# EAGLE board saturn_frontend_rv6 (EAGLE 7.7.0)
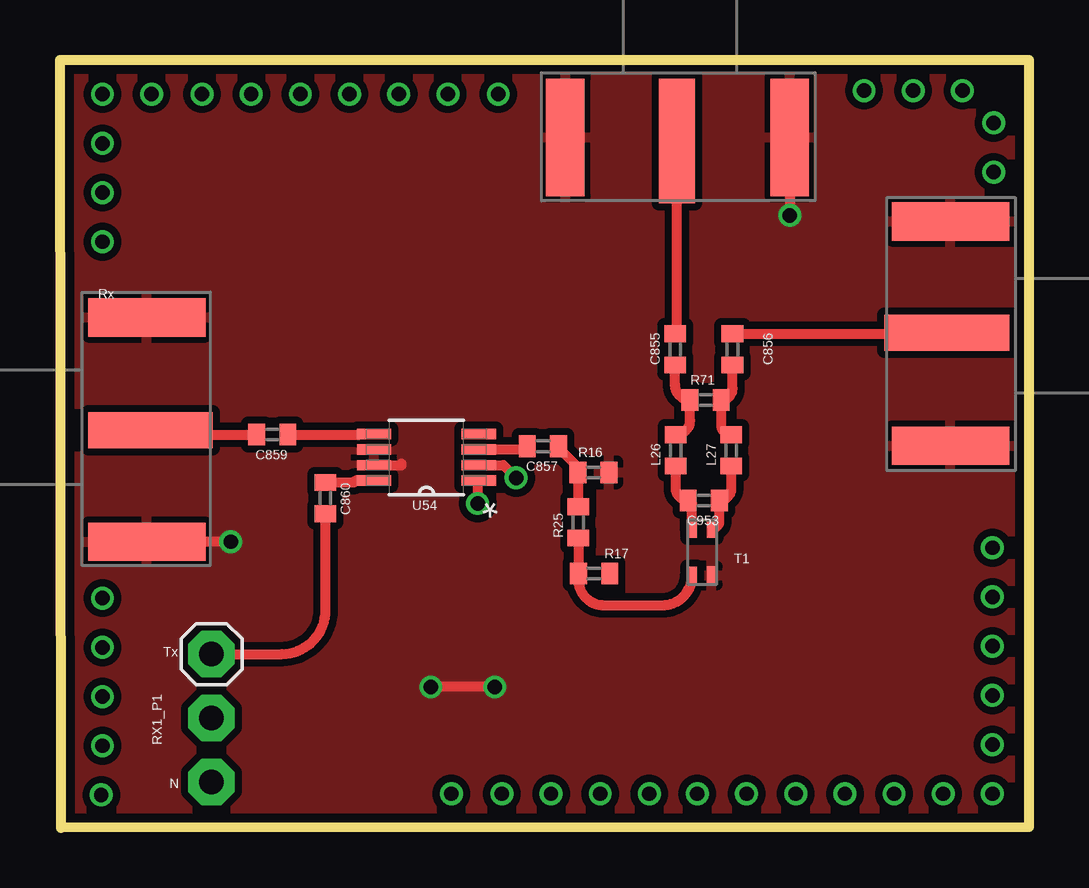
[diagram p0: board, top side]
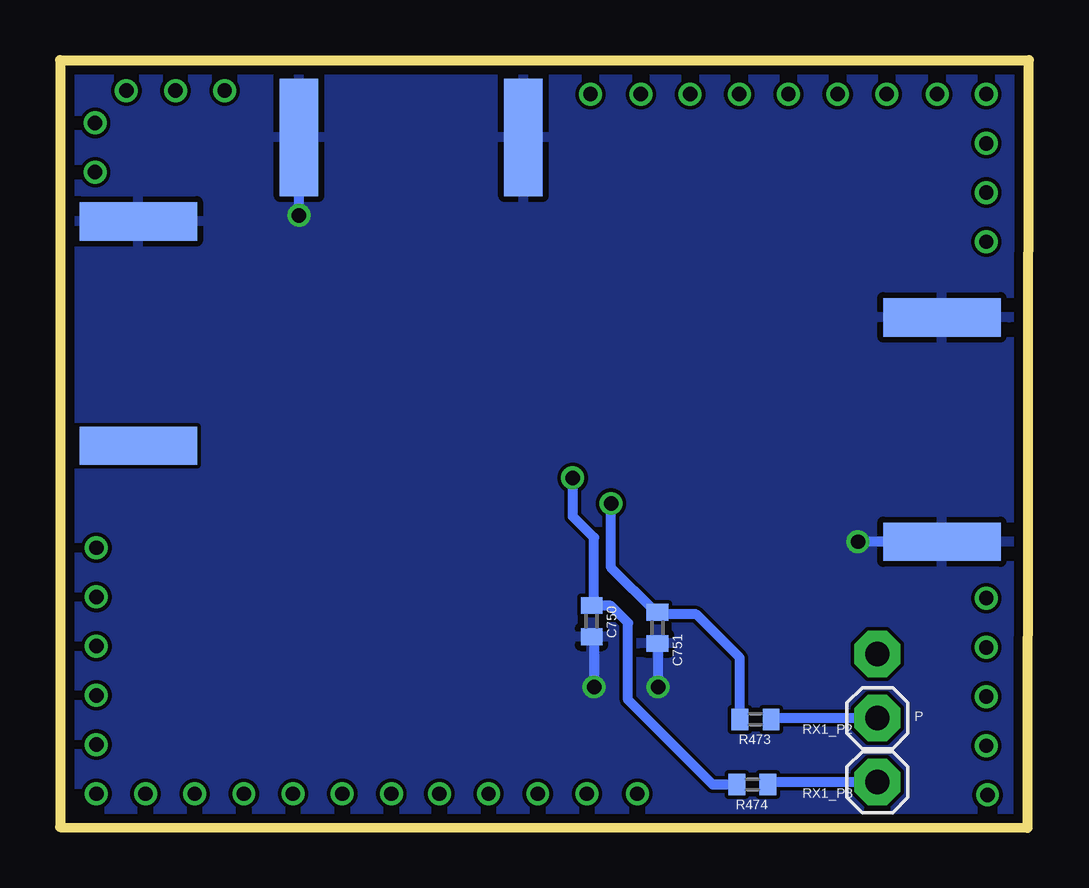
[diagram p1: board, bottom side, seen from below]

Size 40.39 x 31.99 mm. Coordinates in mm from the lower left corner, seen from the top.
Outline: 40.39,31.99 40.39,0.03 0.05,0 0,31.99 40.39,31.99
Copper layers (1*16): Top 0.0356mm / dielectric 1.5011mm / Bottom 0.0356mm
Design rules "oshpark-2layer": minimum track width 6mil, minimum drill 13mil, track to track 6mil, track to pad 6mil, pad to pad 6mil, via to via 6mil, smd to smd 6mil, copper to edge 15mil, drill to drill 6mil, minimum pad ring 7mil, minimum via ring 7mil, stop-mask expansion 2.5mil, vias tented up to drill 0mil, thermal gap 10mil

## Footprints (pad centres in the part's own frame; a part is rotated, then mirrored left to right if it is on the bottom)
C0402 = smd 0.7 x 0.9: 1 -0.65,0; 2 0.65,0
ATB2012E-50011M-T01 = smd 0.75 x 0.4: 1 0.37,1.02; 2 0.385,0.205; 3 2.32,1.02; 4 2.325,0.21
SMA132289 = smd 1.6 x 4.9 bottom: GND 0.9,2.55; P$5 10.25,2.55 | smd 1.6 x 4.9: P$1 10.25,2.55; P$2 0.9,2.55 | smd 1.5 x 5.2: P$3 5.6,2.7
R0402 = smd 0.7 x 0.9: 1 -0.65,0; 2 0.65,0
1X01 = drill 1.016 pad 1.93 octagon: 1 0,0
SOP65P490X110-8N = smd 1.422 x 0.432: 1 -2.184,0.965; 2 -2.184,0.33; 3 -2.184,-0.33; 4 -2.184,-0.965; 5 2.184,-0.965; 6 2.184,-0.33; 7 2.184,0.33; 8 2.184,0.965

## Placement (x,y rotation side)
C750  100 pF  [C0402]  18.23,8.61 270 bottom
C751  100 pF  [C0402]  15.48,8.33 270 bottom
C855  100 pF  [C0402]  25.64,19.93 90 top
C856  100 pF  [C0402]  28.03,19.93 90 top
C857  100 pF  [C0402]  20.13,15.9 180 top
C859  100 pF  [C0402]  8.85,16.38 180 top
C860  100 pF  [C0402]  11.06,13.74 270 top
C953  400 fF  [C0402]  26.84,13.64 180 top
E$1  [ATB2012E-50011M-T01]  27.37,10.13 90 top
E$2  [SMA132289]  1.07,22.17 270 top
E$3  [SMA132289]  31.32,31.32 180 top
E$4  [SMA132289]  39.67,15.02 90 top
L26  1 nH  [R0402]  25.67,15.72 90 top
L27  1 nH  [R0402]  27.98,15.72 90 top
R16  221 Ohm  [R0402]  22.24,14.81 0 top
R17  221 Ohm  [R0402]  22.26,10.59 0 top
R25  23.7 Ohm  [R0402]  21.6,12.72 90 top
R71  93.7 Ohm  [R0402]  26.91,17.83 0 top
R473  100 Ohm  [R0402]  11.39,4.52 180 bottom
R474  100 Ohm  [R0402]  11.52,1.8 180 bottom
RX1_P1  [1X01]  6.31,7.24 0 top
RX1_P2  [1X01]  6.31,4.57 0 bottom
RX1_P3  [1X01]  6.31,1.91 0 bottom
U54  [SOP65P490X110-8N]  15.27,15.44 180 top

## Library data of the parts
C750 C751 C855-C857 C859 C860 C953 L26 L27 R16 R17 R25 R71 R473 R474 = eagle-ltspice
E$1-E$4 = cody_custom_library
RX1_P1-RX1_P3 = adafruit
U54 = SOP65P490X110-8N

## Nets
GND: C750.2 C751.2 E$1.2 E$2.GND E$2.P$1 E$2.P$2 E$2.P$5 E$3.GND E$3.P$1 E$3.P$2 E$3.P$5 E$4.P$1 E$4.P$2 E$4.P$5 R16.2 U54.6 U54.7
S$1: C859.2
S$2: C860.2 RX1_P1.1
S$3: C859.1 U54.5
S$5: C860.1 U54.8
S$6: R473.1 RX1_P2.1
S$7: R474.1 RX1_P3.1
S$8: E$1.1 R17.1 R25.1
S$10: C855.1 L26.2 R71.1
S$12: C857.2 U54.3
S$14: R16.1 R25.2
S$19: C856.1 L27.2 R71.2
S$23: C751.1 R473.2 U54.1
S$25: C953.1 E$1.4 L27.1
S$28: C857.1
S$29: C953.2 E$1.3 L26.1
S$32: C750.1 R474.2 U54.2
S$33: C856.2 E$4.P$3
S$34: C855.2 E$3.P$3

## Tracks (layer width: path | path; a pad name or v marks a point on that pad's centre or on a via)
GND  (via drill 0.6)
  Top 0.406: v18.12,5.87 v15.46,5.87 | U54.7 14.22,15.11 14.22,15.17 | v7.12,11.92 E$2.P$1 | E$3.P$2 v30.42,25.52
  Bottom 0.406: C751.2 15.46,7.65 v15.46,5.87 15.46,5.69 | v18.12,5.87 18.12,8 C750.2 | E$2.P$1 v7.12,11.92 | v30.42,25.52 E$3.P$2
  pour Top (isolate 0.305): 40.39,31.94 0,31.99 0.05,0 40.44,0.03
  pour Bottom: 0.02,31.97 40.42,32.02 40.42,0.02 0.07,0.02
S$1
  Top 0.406: 2.95,16.37 7.49,16.37 C859.2
S$2
  Top 0.406: 11.01,13.04 C860.2 11.06,9.07 11.07,9.07 arc-90 9.24,7.24 RX1_P1.1
S$3
  Top 0.406: C859.1 12.41,16.38 12.43,16.36 12.48,16.4 U54.5
S$5
  Top 0.406: C860.1 12.25,14.39 12.33,14.47 U54.8
S$6
  Bottom 0.406: RX1_P2.1 10.69,4.57 R473.1
S$7
  Bottom 0.406: 10.82,1.93 R474.1 10.77,1.9 RX1_P3.1
S$8
  Top 0.254: 26.35,10.34 E$1.1
  Top 0.406: R25.1 21.6,10.96 R17.1 21.61,10.33 arc90 22.67,9.27 25.11,9.27 arc90 E$1.1
S$10
  Top 0.406: L26.2 arc90 26.26,16.97 R71.1 arc-90 25.64,18.45 C855.1
S$12
  Top 0.406: U54.3 19.35,15.77 C857.2
S$14
  Top 0.254: 21.55,14.68 R16.1
  Top 0.406: R16.1 21.59,13.47 R25.2
S$18  (via drill 0.6)
  other vias: 18.27,30.57
S$19
  Top 0.406: L27.2 arc-90 27.56,16.79 R71.2 arc90 28.03,18.3 C856.1
S$23  (via drill 0.6)
  Top 0.406: 17.41,14.43 U54.1 17.41,14.4 v17.41,13.51
  Bottom 0.406: R473.2 12.04,7.08 13.86,8.89 15.39,8.89 C751.1 15.55,8.98 17.41,10.85 v17.41,13.51 17.41,13.69
S$25
  Top 0.254: 27.27,13.54 C953.1
  Top 0.406: 27.57,13.66 C953.1 | C953.1 27.49,13.81 | 27.9,15 L27.1 27.98,14.13 arc-90 C953.1 | E$1.4 arc90 27.49,12.79 C953.1
S$27  (via drill 0.6)
  other vias: 33.52,30.72
S$28
  Top 0.406: C857.1 20.78,15.83 21.5,15.11
S$29
  Top 0.254: 26.35,12.62 E$1.3 | 26.35,13.54 C953.2
  Top 0.406: C953.2 26.07,13.74 | 26.3,13.62 C953.2 | 25.59,15 L26.1 25.67,14.16 arc90 C953.2 | E$1.3 26.35,13.48 arc90 C953.2
S$32  (via drill 0.6)
  Top 0.406: v19.01,14.58 18.48,15.11 17.59,15.11 U54.2
  Bottom 0.406: v19.01,14.58 19.01,12.98 18.12,12.09 18.12,9.42 C750.1 18.21,9.25 17.41,9.25 16.7,8.53 16.7,5.33 13.17,1.8 R474.2
S$33
  Top 0.406: C856.2 36.97,20.58 E$4.P$3
S$34
  Top 0.406: C855.2 25.72,20.58 E$3.P$3
S$36  (via drill 0.6)
  other vias: 35.57,30.72
S$37  (via drill 0.6)
  other vias: 1.77,30.57
S$38  (via drill 0.6)
  other vias: 16.17,30.57
S$39  (via drill 0.6)
  other vias: 1.77,28.52
S$40  (via drill 0.6)
  other vias: 1.77,26.47
S$41  (via drill 0.6)
  other vias: 1.77,24.42
S$42  (via drill 0.6)
  other vias: 1.77,9.57
S$43  (via drill 0.6)
  other vias: 1.77,7.52
S$44  (via drill 0.6)
  other vias: 18.42,1.42
S$45  (via drill 0.6)
  other vias: 1.77,5.47
S$46  (via drill 0.6)
  other vias: 1.77,3.42
S$47  (via drill 0.6)
  other vias: 1.72,1.37
S$48  (via drill 0.6)
  other vias: 20.47,1.42
S$49  (via drill 0.6)
  other vias: 22.52,1.42
S$50  (via drill 0.6)
  other vias: 24.57,1.42
S$51  (via drill 0.6)
  other vias: 26.57,1.42
S$52  (via drill 0.6)
  other vias: 28.62,1.42
S$53  (via drill 0.6)
  other vias: 30.67,1.42
S$54  (via drill 0.6)
  other vias: 34.77,1.42
S$55  (via drill 0.6)
  other vias: 38.87,5.52
S$56  (via drill 0.6)
  other vias: 38.87,7.57
S$57  (via drill 0.6)
  other vias: 38.87,9.62
S$58  (via drill 0.6)
  other vias: 38.92,29.37
S$59  (via drill 0.6)
  other vias: 38.87,11.67
S$60  (via drill 0.6)
  other vias: 38.92,27.32
S$61  (via drill 0.6)
  other vias: 38.87,3.47
S$62  (via drill 0.6)
  other vias: 38.87,1.42
S$63  (via drill 0.6)
  other vias: 36.82,1.42
S$64  (via drill 0.6)
  other vias: 32.72,1.42
S$65  (via drill 0.6)
  other vias: 16.32,1.42
S$66  (via drill 0.6)
  other vias: 3.82,30.57
S$67  (via drill 0.6)
  other vias: 5.92,30.57
S$68  (via drill 0.6)
  other vias: 7.97,30.57
S$69  (via drill 0.6)
  other vias: 10.02,30.57
S$70  (via drill 0.6)
  other vias: 12.07,30.57
S$71  (via drill 0.6)
  other vias: 14.12,30.57
S$72  (via drill 0.6)
  other vias: 37.62,30.72

## Text on the board
tPlace: Rx | T1 | Tx | N
bPlace: P